# Altium PCB 175-00036, rev1, Super Sniffer.PcbDoc (part 3 of 4)
Units mil, origin at the board's own origin, x right, y up, seen from the top; angles counter-clockwise.
Board outline 6299.21 x 7874.02 mil, 5 copper layers (Top Layer (*.GTL), Mid-Layer 1 (*.G1), Internal Plane 1 (*.GP1), Mid-Layer 2  (*.G2), Bottom Layer (*.GBL)); 205 components, 359 nets, 1160 pads, 445 vias.
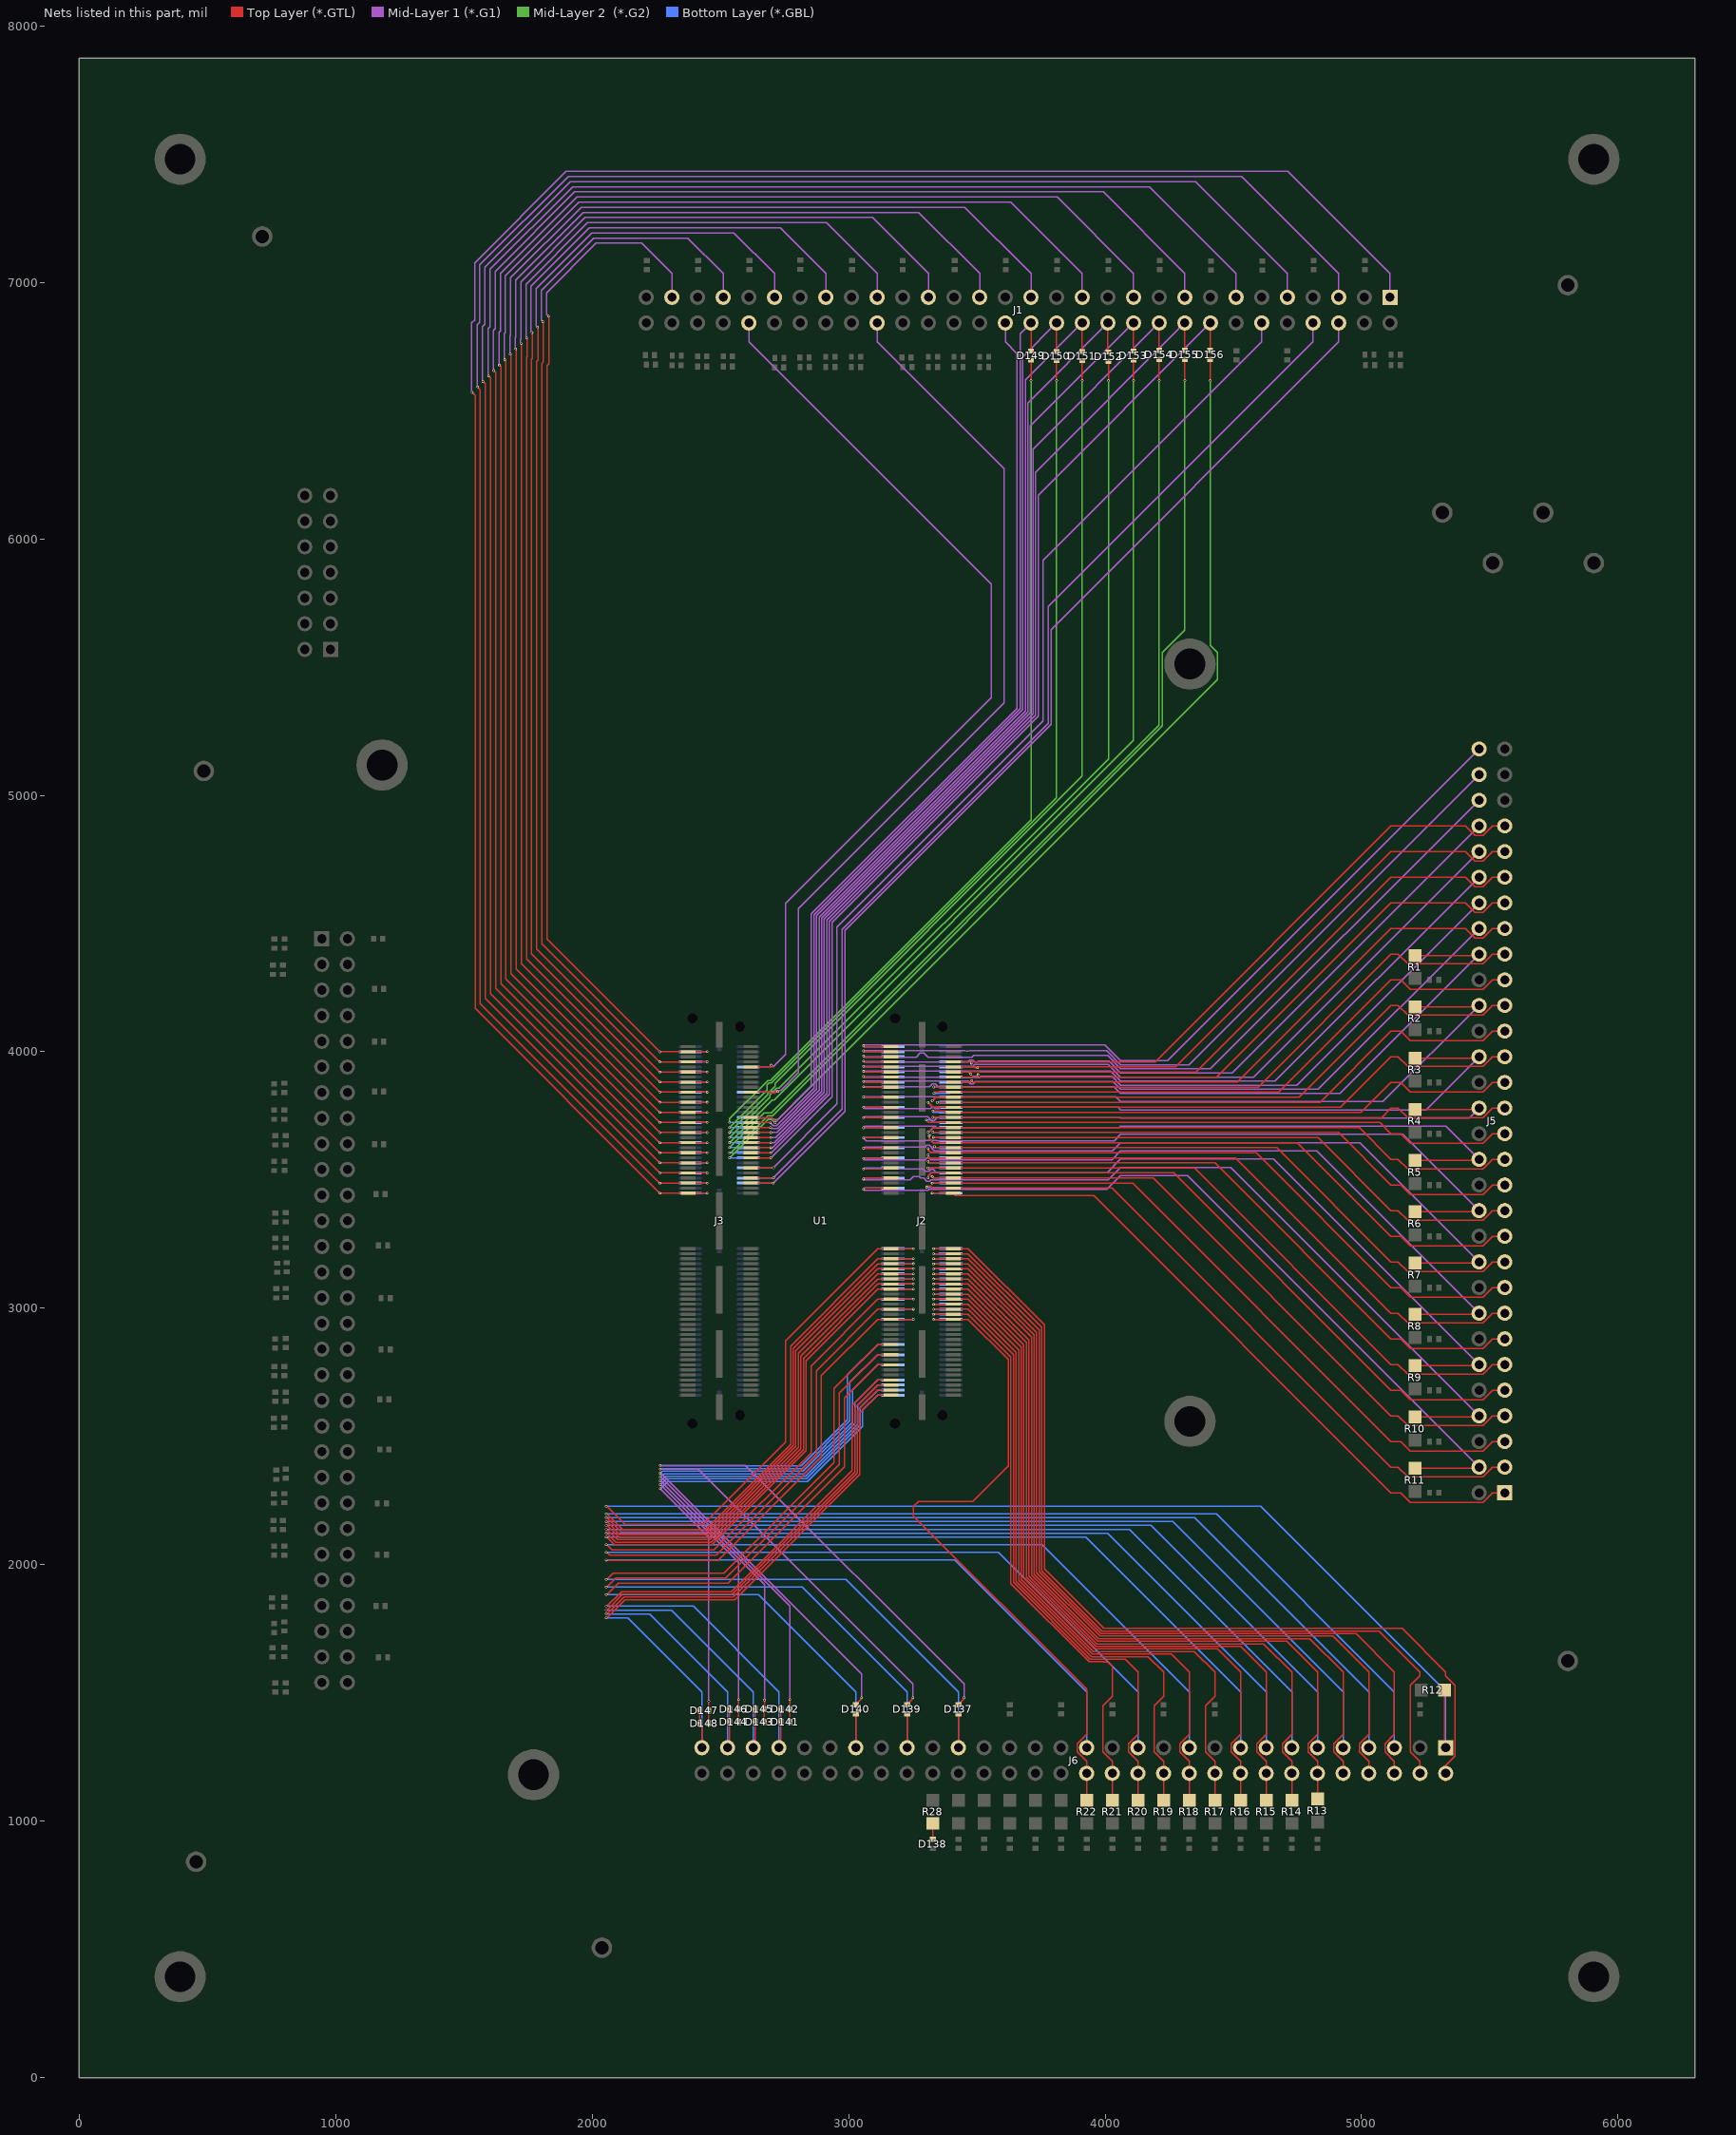
[diagram p6: the nets of this part, all layers, seen from the top]

## Via types
v1: diameter 10, hole 6, Top Layer (*.GTL) to Bottom Layer (*.GBL), 437 vias
v2: diameter 20, hole 10, Top Layer (*.GTL) to Bottom Layer (*.GBL), 8 vias

## Nets (pads, with @x,y where several pads share a name; then routed paths per layer and width w, separated by ;. In a path a pad name is that pad's centre, name@x,y a point inside that pad or via, vN(x,y) a via of type N, cw(c..) or ccw(c..) an arc to the next point about the centre after c; other vN are vias at no path point) (continued)
NetD137_1: D137.1 J6.39 U1.A100 | length 3563.3
  Top Layer (*.GTL) w5: v1(2055.05,1943.35) 2057.72,1943.35 2082.19,1967.81 2512.75,1967.81 2944.05,2399.11 2944.05,2688.39 3114.05,2858.39 U1.A100@3164.9,2858.39 ; J6.39@3428.05,1286.81 D137.1@3428.05,1419.09
  Bottom Layer (*.GBL) w5: v1(2055.05,1943.35) 2989.51,1943.35 3428.05,1504.81 J6.39@3428.05,1286.81
NetD137_2: D137.2 J2.100 | length 2833
  Top Layer (*.GTL) w5: D137.2@3426.05,1454.53 v1@3450.05,1478.53
  Mid-Layer 1 (*.G1) w5: v1(2265.05,2387.31) 2597.55,2387.31 3450.05,1534.81 v1(3450.05,1481.81)
  Bottom Layer (*.GBL) w5: v1(2265.05,2387.31) 2267.55,2384.81 2814.76,2384.81 2995.05,2565.1 2995.05,2740.41 3113.05,2858.41 J2.100@3173.06,2858.41
NetD138_2: D138.2 R28.2 | length 62.3
  Top Layer (*.GTL) w5: D138.2@3328.05,929.53 R28.2@3328.05,991.81
NetD139_1: D139.1 J6.43 U1.A104 | length 3340.5
  Top Layer (*.GTL) w5: v1(2055.05,1913.35) 2057.72,1913.35 2092.19,1947.81 2521.03,1947.81 2964.05,2390.83 2964.05,2669.02 3114.05,2819.02 U1.A104@3164.9,2819.02 ; J6.43@3228.05,1286.81 D139.1@3228.05,1419.09
  Bottom Layer (*.GBL) w5: v1(2055.05,1913.35) 2819.51,1913.35 3228.05,1504.81 J6.43@3228.05,1286.81
NetD139_2: D139.2 J2.104 | length 2600.8
  Top Layer (*.GTL) w5: D139.2@3227.05,1454.53 v1@3251.05,1478.53
  Mid-Layer 1 (*.G1) w5: v1(2265.05,2372.31) 2413.55,2372.31 3251.05,1534.81 v1(3251.05,1481.81)
  Bottom Layer (*.GBL) w5: v1(2265.05,2372.31) 2267.55,2374.81 2818.9,2374.81 3005.05,2560.96 3005.05,2711.01 3113.05,2819.01 J2.104@3173.06,2819.01
NetD140_1: D140.1 J6.47 U1.A108 | length 3117.9
  Top Layer (*.GTL) w5: v1(2055.05,1883.35) 2057.72,1883.35 2101.9,1927.52 2529.44,1927.52 2984.05,2382.13 2984.05,2649.65 3114.05,2779.65 U1.A108@3164.9,2779.65 ; J6.47@3028.05,1286.81 D140.1@3028.05,1419.09
  Bottom Layer (*.GBL) w5: v1(2055.05,1883.35) 2649.51,1883.35 3028.05,1504.81 J6.47@3028.05,1286.81
NetD140_2: D140.2 J2.108 | length 2392.6
  Top Layer (*.GTL) w5: D140.2@3027.05,1454.53 v1@3051.05,1478.53
  Mid-Layer 1 (*.G1) w5: v1(2265.05,2357.31) 2267.72,2357.31 3051.05,1573.99 v1(3051.05,1481.81)
  Bottom Layer (*.GBL) w5: v1(2265.05,2357.31) 2267.72,2357.31 2275.22,2364.81 2823.04,2364.81 3015.05,2556.82 3015.05,2681.61 3113.05,2779.61 J2.108@3173.06,2779.61
NetD141_1: D141.1 D142.2 J6.53 U1.A114 | length 2805.9
  Top Layer (*.GTL) w5: v1(2055.05,1838.35) 2057.72,1838.35 2115.08,1895.7 2542.62,1895.7 3014.05,2367.13 3014.05,2620.6 3114.05,2720.6 U1.A114@3164.9,2720.6 ; J6.53@2728.05,1286.81 2735.33,1294.09 D141.1@2735.33,1386.81 D142.2@2735.33,1436.81
  Bottom Layer (*.GBL) w5: v1(2055.05,1838.35) 2394.51,1838.35 2728.05,1504.81 J6.53@2728.05,1286.81
NetD141_2: D141.2 D142.1 J2.114 | length 2277.1
  Top Layer (*.GTL) w5: D141.2@2770.76,1386.81 D142.1@2770.76,1436.81 ; D142.1@2771.05,1437.81 v1(2771.05,1473.81)
  Mid-Layer 1 (*.G1) w5: v1(2265.05,2342.31) 2267.72,2342.31 2771.05,1838.99 v1(2771.05,1473.81)
  Bottom Layer (*.GBL) w5: v1(2265.05,2342.31) 2267.72,2342.31 2280.22,2354.81 2827.18,2354.81 3025.05,2552.67 3025.05,2632.51 3113.05,2720.51 J2.114@3173.06,2720.51
NetD143_1: D143.1 D145.2 J6.55 U1.A116 | length 2684.7
  Top Layer (*.GTL) w5: v1(2055.05,1823.35) 2057.72,1823.35 2119.47,1885.1 2547.01,1885.1 3024.05,2362.13 3024.05,2610.91 3114.05,2700.91 U1.A116@3164.9,2700.91 ; J6.55@2635.33,1294.09 D143.1@2635.33,1386.81 D145.2@2635.33,1436.81
  Bottom Layer (*.GBL) w5: v1(2055.05,1823.35) 2309.51,1823.35 2628.05,1504.81 J6.55@2628.05,1286.81
NetD143_2: D143.2 D145.1 J2.116 | length 2216.9
  Top Layer (*.GTL) w5: D143.2@2670.76,1386.81 D145.1@2670.76,1436.81 ; D145.1@2672.05,1436.81 v1(2672.05,1472.81)
  Mid-Layer 1 (*.G1) w5: v1(2265.05,2327.31) 2267.72,2327.31 2672.05,1922.99 v1(2672.05,1472.81)
  Bottom Layer (*.GBL) w5: v1(2265.05,2327.31) 2267.72,2327.31 2285.22,2344.81 2831.33,2344.81 3035.05,2548.53 3035.05,2622.81 3113.05,2700.81 J2.116@3173.06,2700.81
NetD144_1: D144.1 D146.2 J6.57 U1.A118 | length 2573.8
  Top Layer (*.GTL) w5: v1(2055.05,1808.35) 2057.72,1808.35 2123.87,1874.49 2551.4,1874.49 3034.05,2357.13 3034.05,2601.23 3114.05,2681.23 U1.A118@3164.9,2681.23 ; J6.57@2535.33,1294.09 D144.1@2535.33,1386.81 D146.2@2535.33,1436.81
  Bottom Layer (*.GBL) w5: v1(2055.05,1808.35) 2224.51,1808.35 2528.05,1504.81 J6.57@2528.05,1286.81
NetD144_2: D144.2 D146.1 J2.118 | length 2153.8
  Top Layer (*.GTL) w5: D144.2@2570.76,1386.81 D146.1@2570.76,1436.81 ; D146.1@2571.05,1437.81 v1(2571.05,1473.81)
  Mid-Layer 1 (*.G1) w5: v1(2265.05,2312.31) 2267.72,2312.31 2571.05,2008.99 v1(2571.05,1473.81)
  Bottom Layer (*.GBL) w5: v1(2265.05,2312.31) 2267.72,2312.31 2290.22,2334.81 2835.47,2334.81 3045.05,2544.39 3045.05,2613.11 3113.05,2681.11 J2.118@3173.06,2681.11
NetD147_1: D147.1 D148.2 J6.59 U1.A120 | length 2468.7
  Top Layer (*.GTL) w5: v1(2055.05,1793.35) 2057.72,1793.35 2128.26,1863.88 2555.8,1863.88 3044.05,2352.13 3044.05,2591.54 3114.05,2661.54 U1.A120@3164.9,2661.54 ; D147.1@2419.61,1431.81 D148.2@2419.61,1381.81 2427.7,1373.72 2427.7,1287.15 J6.59@2428.05,1286.81
  Bottom Layer (*.GBL) w5: v1(2055.05,1793.35) 2139.51,1793.35 2428.05,1504.81 J6.59@2428.05,1286.81
NetD147_2: D147.2 D148.1 J2.120 | length 2090
  Top Layer (*.GTL) w5: D148.1@2455.05,1381.81 D147.2@2455.05,1431.81 v1(2455.05,1467.81)
  Mid-Layer 1 (*.G1) w5: v1(2265.05,2297.31) 2455.05,2107.31 v1(2455.05,1467.81)
  Bottom Layer (*.GBL) w5: v1(2265.05,2297.31) 2267.72,2297.31 2295.22,2324.81 2839.61,2324.81 3055.05,2540.25 3055.05,2603.41 3113.05,2661.41 J2.120@3173.06,2661.41
NetD149_1: D149.1 J1.30 U1.B31 | length 3760.6
  Top Layer (*.GTL) w5: U1.B31@2618.05,3724.54 2697,3724.54 2695.46,3723 v1(2695,3723) ; D149.1@3711.05,6732.28 J1.30@3711.05,6841.81
  Mid-Layer 1 (*.G1) w5: v1(2695,3723) 2706.5,3711.5 2718.18,3711.5 2865,3858.32 2865,4534 3669,5338 3669,6799.76 J1.30@3711.05,6841.81
NetD149_2: D149.2 J3.31 | length 3537.4
  Top Layer (*.GTL) w5: v1(3711.05,6617) D149.2@3711.05,6696.85
  Mid-Layer 2  (*.G2) w5: v1(2536.05,3724.71) 2536.05,3738.87 2685.68,3888.5 2695.18,3888.5 3711.05,4904.37 v1(3711.05,6617)
  Bottom Layer (*.GBL) w5: v1(2536.05,3724.71) J3.31@2609.04,3724.71
NetD150_1: D150.1 J1.28 U1.B33 | length 3808.5
  Top Layer (*.GTL) w5: U1.B33@2618.05,3704.85 2697,3704.85 2696.15,3704 v1(2696,3704) ; D150.1@3811.05,6732.28 J1.28@3811.05,6841.81
  Mid-Layer 1 (*.G1) w5: v1(2696,3704) 2698.5,3701.5 2722.32,3701.5 2875,3854.18 2875,4529.86 3679,5333.86 3679,6709.76 J1.28@3811.05,6841.81
NetD150_2: D150.2 J3.33 | length 3596.5
  Top Layer (*.GTL) w5: v1(3811.05,6617) D150.2@3811.05,6694.89
  Mid-Layer 2  (*.G2) w5: v1(2536.05,3705.01) 2682.5,3851.47 2682.5,3871.18 2689.82,3878.5 2699.32,3878.5 3811.05,4990.23 v1(3811.05,6617)
  Bottom Layer (*.GBL) w5: v1(2536.05,3705.01) J3.33@2609.04,3705.01
NetD151_1: D151.1 J1.26 U1.B35 | length 3861.5
  Top Layer (*.GTL) w5: U1.B35@2618.05,3685.17 v1(2697,3685.17) ; D151.1@3911.05,6732.28 J1.26@3911.05,6841.81
  Mid-Layer 1 (*.G1) w5: v1(2697,3685.17) 2720.13,3685.17 2885,3850.04 2885,4525.72 3689,5329.72 3689,6619.76 J1.26@3911.05,6841.81
NetD151_2: D151.2 J3.35 | length 3652.1
  Top Layer (*.GTL) w5: v1(3911.05,6617) D151.2@3911.05,6694.89
  Mid-Layer 2  (*.G2) w5: v1(2536.05,3685.31) 2683.5,3832.77 2683.5,3836.32 2713.5,3866.32 2713.5,3877.18 3911.05,5074.72 v1(3911.05,6617)
  Bottom Layer (*.GBL) w5: v1(2536.05,3685.31) J3.35@2609.04,3685.31
NetD152_1: D152.1 J1.24 U1.B37 | length 3919.4
  Top Layer (*.GTL) w5: U1.B37@2618.05,3665.48 v1(2697,3665.48) ; D152.1@4011.05,6732.28 J1.24@4011.05,6841.81
  Mid-Layer 1 (*.G1) w5: v1(2697,3665.48) 2714.58,3665.48 2895,3845.9 2895,4521.57 3699,5325.57 3699,6529.76 J1.24@4011.05,6841.81
NetD152_2: D152.2 J3.37 | length 3718.2
  Top Layer (*.GTL) w5: v1(4013.05,6617) D152.2@4013.05,6692.91
  Mid-Layer 2  (*.G2) w5: v1(2536.05,3665.61) 2693.5,3823.07 2693.5,3832.18 2718.82,3857.5 2729.18,3857.5 4013.05,5141.37 v1(4013.05,6617)
  Bottom Layer (*.GBL) w5: v1(2536.05,3665.61) J3.37@2609.04,3665.61
NetD153_1: D153.1 J1.22 U1.B39 | length 3977.3
  Top Layer (*.GTL) w5: U1.B39@2618.05,3645.8 v1(2697,3645.8) ; D153.1@4111.05,6732.28 J1.22@4111.05,6841.81
  Mid-Layer 1 (*.G1) w5: v1(2697,3645.8) 2709.04,3645.8 2905,3841.75 2905,4517.43 3709,5321.43 3709,6439.76 J1.22@4111.05,6841.81
NetD153_2: D153.2 J3.39 | length 3780.7
  Top Layer (*.GTL) w5: v1(4111.05,6617) D153.2@4111.05,6696.85
  Mid-Layer 2  (*.G2) w5: v1(2536.05,3645.91) 2702.09,3811.96 2709.63,3811.96 4111.05,5213.37 v1(4111.05,6617)
  Bottom Layer (*.GBL) w5: v1(2536.05,3645.91) J3.39@2609.04,3645.91
NetD154_1: D154.1 J1.20 U1.B41 | length 4035.1
  Top Layer (*.GTL) w5: U1.B41@2618.05,3626.11 v1(2697,3626.11) ; D154.1@4211.05,6732.28 D154.1@4211.05,6735.53 J1.20@4211.05,6841.81
  Mid-Layer 1 (*.G1) w5: v1(2697,3626.11) 2703.5,3626.11 2915,3837.61 2915,4513.29 3719,5317.29 3719,6349.76 J1.20@4211.05,6841.81
NetD154_2: D154.2 J3.41 | length 3857.1
  Top Layer (*.GTL) w5: v1(4211.05,6617) D154.2@4211.05,6700.09
  Mid-Layer 2  (*.G2) w5: v1(2536.05,3626.21) 2671.14,3761.31 2699.22,3761.31 4211.05,5273.13 v1(4211.05,6617)
  Bottom Layer (*.GBL) w5: v1(2536.05,3626.21) J3.41@2609.04,3626.21
NetD155_1: D155.1 J1.18 U1.B43 | length 4093
  Top Layer (*.GTL) w5: U1.B43@2618.05,3606.43 v1(2697,3606.43) ; D155.1@4311.05,6732.28 D155.1@4311.05,6735.53 J1.18@4311.05,6841.81
  Mid-Layer 1 (*.G1) w5: v1(2697,3606.43) 2697.96,3606.43 2925,3833.47 2925,4509.15 3729,5313.15 3729,6259.76 J1.18@4311.05,6841.81
NetD155_2: D155.2 J3.43 | length 3915
  Top Layer (*.GTL) w5: v1(4311.05,6617) D155.2@4311.05,6700.09
  Mid-Layer 2  (*.G2) w5: v1(2536.05,3606.51) 2541.61,3606.51 2686.4,3751.31 2703.37,3751.31 4223.21,5271.15 4223.21,5556.34 4311.05,5644.18 v1(4311.05,6617)
  Bottom Layer (*.GBL) w5: v1(2536.05,3606.51) J3.43@2609.04,3606.51
NetD156_1: D156.1 J1.16 U1.B45 | length 4153.5
  Top Layer (*.GTL) w5: U1.B45@2618.05,3586.74 v1(2697,3586.74) ; D156.1@4411.05,6732.28 J1.16@4411.05,6841.81
  Mid-Layer 1 (*.G1) w5: v1(2697,3586.74) 2935,3824.74 2935,4505.01 3739,5309.01 3739,6169.76 J1.16@4411.05,6841.81
NetD156_2: D156.2 J3.45 | length 4008.6
  Top Layer (*.GTL) w5: v1(4409.45,6617) D156.2@4409.45,6700.09
  Mid-Layer 2  (*.G2) w5: v1(2536.05,3586.81) 2685.73,3736.5 2724.18,3736.5 4438.21,5450.53 4438.21,5556.34 4409.45,5585.1 v1(4409.45,6617)
  Bottom Layer (*.GBL) w5: v1(2536.05,3586.81) J3.45@2609.04,3586.81
NetJ1_1: J1.1 J3.60 U1.B60 | length 8161.3
  Top Layer (*.GTL) w5: v1(1532.46,6571.22) 1544.05,6559.63 1544.05,4168.94 v1(2264.05,3448.94) U1.B60@2374.74,3448.94 2448.91,3448.94 v1(2449.05,3448.81)
  Mid-Layer 1 (*.G1) w5: v1(1532.46,6571.22) 1530.56,6573.11 1530.56,6841.56 1542.05,6853.05 1542.05,7075.93 1898.93,7432.81 4713.05,7432.81 5111.05,7034.81 J1.1@5111.05,6941.81
  Bottom Layer (*.GBL) w5: J3.60@2383.06,3448.91 2448.94,3448.91 v1(2449.05,3448.81)
NetJ1_5: J1.5 J3.56 U1.B56 | length 7871.2
  Top Layer (*.GTL) w5: v1(1553.67,6592.43) 1564.05,6582.05 1564.05,4188.32 v1(2264.05,3488.32) U1.B56@2374.74,3488.32 2448.94,3488.32 v1(2449.05,3488.21)
  Mid-Layer 1 (*.G1) w5: v1(1553.67,6592.43) 1551.78,6594.33 1551.78,6834.49 1562.05,6844.76 1562.05,7067.65 1907.21,7412.81 4533.05,7412.81 4911.05,7034.81 J1.5@4911.05,6941.81
  Bottom Layer (*.GBL) w5: J3.56@2383.06,3488.31 2448.94,3488.31 v1(2449.05,3488.21)
NetJ1_6: J1.6 J3.55 U1.B55 | length 4451.8
  Top Layer (*.GTL) w5: U1.B55@2618.05,3488.32 v1(2706.05,3488.32)
  Mid-Layer 1 (*.G1) w5: v1(2706.05,3488.32) 2985.05,3767.32 2985.05,4472.97 3789,5276.93 3789,5645.76 4911.05,6767.81 J1.6@4911.05,6841.81
  Bottom Layer (*.GBL) w5: J3.55@2609.04,3488.31 v1(2706.05,3488.32)
NetJ1_8: J1.8 J3.53 U1.B53 | length 4393.7
  Top Layer (*.GTL) w5: U1.B53@2618.05,3508 2706.86,3508 v1(2707.05,3507.81)
  Mid-Layer 1 (*.G1) w5: v1(2707.05,3507.81) 2706.24,3507.81 2706.05,3508 2975.05,3777 2975.05,4477.12 3779,5281.07 3779,5735.76 4811.05,6767.81 J1.8@4811.05,6841.81
  Bottom Layer (*.GBL) w5: J3.53@2609.04,3508.01 v1@2706.84,3508.01
NetJ1_9: J1.9 J3.52 U1.B52 | length 7581.1
  Top Layer (*.GTL) w5: v1(1574.88,6613.65) 1584.05,6604.48 1584.05,4207.69 v1(2264.05,3527.69) U1.B52@2374.74,3527.69 2448.97,3527.69 v1(2449.05,3527.61)
  Mid-Layer 1 (*.G1) w5: v1(1574.88,6613.65) 1572.99,6615.54 1572.99,6827.42 1582.05,6836.48 1582.05,7059.36 1915.49,7392.81 4353.05,7392.81 4711.05,7034.81 J1.9@4711.05,6941.81
  Bottom Layer (*.GBL) w5: J3.52@2383.06,3527.71 2448.94,3527.71 v1(2449.05,3527.61)
NetJ1_12: J1.12 J3.49 U1.B49 | length 4272.1
  Top Layer (*.GTL) w5: U1.B49@2618.05,3547.37 2706.61,3547.37 v1(2707.05,3547.81)
  Mid-Layer 1 (*.G1) w5: v1(2707.05,3547.81) 2706.61,3547.37 2706.05,3547.37 2955.05,3796.37 2955.05,4485.4 3759,5289.35 3759,5915.76 4611.05,6767.81 J1.12@4611.05,6841.81
  Bottom Layer (*.GBL) w5: J3.49@2609.04,3547.41 2706.65,3547.41 v1(2707.05,3547.81)
NetJ1_13: J1.13 J3.48 U1.B48 | length 7291.1
  Top Layer (*.GTL) w5: v1(1596.1,6634.86) 1604.05,6626.91 1604.05,4227.06 v1(2264.05,3567.06) U1.B48@2374.74,3567.06 v1(2449.05,3567.01) v1(2449.05,3567.01)
  Mid-Layer 1 (*.G1) w5: v1(1596.1,6634.86) 1594.2,6636.75 1594.2,6820.35 1602.05,6828.19 1602.05,7051.08 1923.78,7372.81 4173.05,7372.81 4511.05,7034.81 J1.13@4511.05,6941.81
  Bottom Layer (*.GBL) w5: J3.48@2383.06,3567.11 2448.94,3567.11 v1(2449.05,3567.01)
NetJ1_17: J1.17 J3.44 U1.B44 | length 7001
  Top Layer (*.GTL) w5: v1(1617.31,6656.07) 1624.05,6649.33 1624.05,4246.43 v1(2264.05,3606.43) U1.B44@2374.74,3606.43 v1(2449.05,3606.41)
  Mid-Layer 1 (*.G1) w5: v1(1617.31,6656.07) 1615.42,6657.97 1615.42,6813.28 1622.05,6819.91 1622.05,7042.8 1932.06,7352.81 3993.05,7352.81 4311.05,7034.81 J1.17@4311.05,6941.81
  Bottom Layer (*.GBL) w5: J3.44@2383.06,3606.51 2448.94,3606.51 v1(2449.05,3606.41)
NetJ1_21: J1.21 J3.40 U1.B40 | length 6710.9
  Top Layer (*.GTL) w5: v1(1638.52,6677.29) 1644.05,6671.76 1644.05,4265.8 v1(2264.05,3645.8) U1.B40@2374.74,3645.8 2406.05,3645.8 v1(2449.05,3645.81)
  Mid-Layer 1 (*.G1) w5: v1(1638.52,6677.29) 1636.63,6679.18 1636.63,6806.21 1642.05,6811.63 1642.05,7034.51 1940.35,7332.81 3813.05,7332.81 4111.05,7034.81 J1.21@4111.05,6941.81
  Bottom Layer (*.GBL) w5: J3.40@2383.06,3645.91 2448.94,3645.91 v1(2449.05,3645.81)
NetJ1_25: J1.25 J3.36 U1.B36 | length 6420.8
  Top Layer (*.GTL) w5: v1(1659.74,6698.5) 1664.05,6694.19 1664.05,4285.17 v1(2264.05,3685.17) U1.B36@2374.74,3685.17 2406.05,3685.17 2406.09,3685.21 v1(2449.05,3685.21)
  Mid-Layer 1 (*.G1) w5: v1(1659.74,6698.5) 1657.84,6700.39 1657.84,6799.14 1662.05,6803.34 1662.05,7026.23 1948.63,7312.81 3633.05,7312.81 3911.05,7034.81 J1.25@3911.05,6941.81
  Bottom Layer (*.GBL) w5: J3.36@2383.06,3685.31 2448.94,3685.31 v1(2449.05,3685.21)
NetJ1_29: J1.29 J3.32 U1.B32 | length 6130.7
  Top Layer (*.GTL) w5: v1(1680.95,6719.71) 1684.05,6716.61 1684.05,4304.54 v1(2264.05,3724.54) U1.B32@2374.74,3724.54 2406.05,3724.54 2406.12,3724.61 v1(2449.05,3724.61)
  Mid-Layer 1 (*.G1) w5: v1(1680.95,6719.71) 1679.05,6721.61 1679.05,6792.06 1682.05,6795.06 1682.05,7017.94 1956.92,7292.81 3453.05,7292.81 3711.05,7034.81 J1.29@3711.05,6941.81
  Bottom Layer (*.GBL) w5: J3.32@2383.06,3724.71 2448.94,3724.71 v1(2449.05,3724.61)
NetJ1_32: J1.32 J3.29 U1.B29 | length 3746.9
  Top Layer (*.GTL) w5: U1.B29@2618.05,3744.22 2699.78,3744.22 2713,3731 v1(2713,3724)
  Mid-Layer 1 (*.G1) w5: v1(2713,3724) 2713,3725.32 2855,3867.32 2855,4538.14 3656.05,5339.19 3656.05,6722.81 3611.05,6767.81 J1.32@3611.05,6841.81
  Bottom Layer (*.GBL) w5: J3.29@2609.04,3744.41 2612.14,3741.31 2694.87,3741.31 2712.18,3724 v1(2713,3724)
NetJ1_33: J1.33 J3.28 U1.B28 | length 5840.7
  Top Layer (*.GTL) w5: v1(1702.16,6740.93) 1704.05,6739.03 1704.05,6725.14 ; 1704.05,6725.13 1704.05,4323.91 v1(2264.05,3763.91) U1.B28@2374.74,3763.91 2448.94,3763.91 v1(2449.05,3764.01)
  Mid-Layer 1 (*.G1) w5: v1(1702.16,6740.93) 1700.27,6742.82 1700.27,6784.99 1702.05,6786.77 1702.05,7009.66 1965.2,7272.81 3273.05,7272.81 3511.05,7034.81 J1.33@3511.05,6941.81
  Bottom Layer (*.GBL) w5: J3.28@2383.06,3764.11 2447.05,3764.11 2447.15,3764.01 v1(2449.05,3764.01)
NetJ1_37: J1.37 J3.24 U1.B24 | length 5551.6
  Top Layer (*.GTL) w5: v1(1723.37,6762.14) 1725.27,6760.25 1725.27,6718.07 1724.05,6716.85 1724.05,4343.28 v1(2264.05,3803.28) U1.B24@2374.74,3803.28 2448.91,3803.28 v1(2449.05,3803.41)
  Mid-Layer 1 (*.G1) w5: v1(1723.37,6762.14) 1721.48,6764.03 1721.48,6777.92 1722.05,6778.49 1722.05,7001.37 1973.48,7252.81 3093.05,7252.81 3311.05,7034.81 J1.37@3311.05,6941.81
  Bottom Layer (*.GBL) w5: J3.24@2383.06,3803.51 2447.05,3803.51 2447.15,3803.41 v1(2449.05,3803.41)
NetJ1_41: J1.41 J3.20 U1.B20 | length 5263.1
  Top Layer (*.GTL) w5: v1(1744.59,6783.35) 1746.48,6781.46 1746.48,6711 1744.05,6708.57 1744.05,4362.65 v1(2264.05,3842.65) U1.B20@2374.74,3842.65 2448.88,3842.65 v1(2449.05,3842.81)
  Mid-Layer 1 (*.G1) w5: v1(1744.59,6783.35) 1742.05,6785.89 1742.05,6993.09 1981.77,7232.81 2913.05,7232.81 3111.05,7034.81 J1.41@3111.05,6941.81
  Bottom Layer (*.GBL) w5: J3.20@2383.06,3842.91 2447.05,3842.91 2447.15,3842.81 v1(2449.05,3842.81)
NetJ1_42: J1.42 J3.19 U1.B19 | length 3843.3
  Top Layer (*.GTL) w5: U1.B19@2618.05,3842.65 2694.18,3842.65 2696.38,3840.45 2706.73,3840.45 2707.49,3841.2 2709.88,3838.81 2710.05,3838.81 2718.05,3846.81 2721.86,3843 2722,3843 v1(2724,3845)
  Mid-Layer 1 (*.G1) w5: v1(2724,3845) 2722,3843 2721.86,3843 2718.05,3846.81 2710.05,3838.81 2709.88,3838.81 2707.49,3841.2 2714.06,3847.77 2714.06,3849.31 2735.13,3849.31 2805,3919.18 2805,4558.85 3606.05,5359.9 3606.05,6272.81 3111.05,6767.81 J1.42@3111.05,6841.81
  Bottom Layer (*.GBL) w5: J3.19@2609.04,3842.91 2694.18,3842.91 2696.73,3845.46 v1@2724,3845.46
NetJ1_45: J1.45 J3.16 U1.B16 | length 4975
  Top Layer (*.GTL) w5: v1(1765.8,6804.56) 1767.69,6802.67 1767.69,6703.93 1764.05,6700.28 1764.05,4382.02 v1(2264.05,3882.02) U1.B16@2374.74,3882.02 2448.85,3882.02 v1(2449.05,3882.21)
  Mid-Layer 1 (*.G1) w5: v1(1765.8,6804.56) 1762.05,6808.32 1762.05,6984.81 1990.05,7212.81 2733.05,7212.81 2911.05,7034.81 J1.45@2911.05,6941.81
  Bottom Layer (*.GBL) w5: J3.16@2383.06,3882.31 2447.05,3882.31 2447.15,3882.21 v1(2449.05,3882.21)
NetJ1_49: J1.49 J3.12 U1.B12 | length 4687
  Top Layer (*.GTL) w5: v1(1787.01,6825.78) 1788.91,6823.88 1788.91,6696.86 1784.05,6692 1784.05,4401.39 v1(2264.05,3921.39) U1.B12@2374.74,3921.39 2448.82,3921.39 v1(2449.05,3921.61)
  Mid-Layer 1 (*.G1) w5: v1(1787.01,6825.78) 1782.05,6830.75 1782.05,6976.52 1998.34,7192.81 2553.05,7192.81 2711.05,7034.81 J1.49@2711.05,6941.81
  Bottom Layer (*.GBL) w5: J3.12@2383.06,3921.71 2447.05,3921.71 2447.15,3921.61 v1(2449.05,3921.61)
NetJ1_52: J1.52 J3.9 U1.B9 | length 3843.7
  Top Layer (*.GTL) w5: U1.B9@2618.05,3941.07 2706.05,3941.07 2700.73,3946.39 2699.2,3946.39 v1(2697.78,3947.81)
  Mid-Layer 1 (*.G1) w5: J1.52@2611.05,6841.81 2611.05,6767.81 3556.05,5822.81 3556.05,5380.61 2755,4579.56 2755,3990.02 2706.05,3941.07 2700.73,3946.39 2699.2,3946.39 v1(2697.78,3947.81)
  Bottom Layer (*.GBL) w5: J3.9@2609.04,3941.41 2692.83,3941.41 v1@2696.73,3945.31
NetJ1_53: J1.53 J3.8 U1.B8 | length 4398.9
  Top Layer (*.GTL) w5: v1(1808.23,6846.99) 1810.12,6845.1 1810.12,6689.79 1804.05,6683.71 1804.05,4420.76 v1(2264.05,3960.76) U1.B8@2374.74,3960.76 2448.79,3960.76 v1(2449.05,3961.01)
  Mid-Layer 1 (*.G1) w5: v1(1808.23,6846.99) 1802.05,6853.17 1802.05,6968.24 2006.62,7172.81 2373.05,7172.81 2511.05,7034.81 J1.53@2511.05,6941.81
  Bottom Layer (*.GBL) w5: J3.8@2383.06,3961.11 2447.05,3961.11 2447.15,3961.01 v1(2449.05,3961.01)
NetJ1_57: J1.57 J3.4 U1.B4 | length 4110.9
  Top Layer (*.GTL) w5: v1(1829.44,6868.2) 1831.33,6866.31 1831.33,6682.72 1824.05,6675.43 1824.05,4440.13 v1(2264.05,4000.13) U1.B4@2374.74,4000.13 2448.76,4000.13 v1(2449.05,4000.41)
  Mid-Layer 1 (*.G1) w5: v1(1829.44,6868.2) 1822.05,6875.6 1822.05,6959.95 2014.91,7152.81 2193.05,7152.81 2311.05,7034.81 J1.57@2311.05,6941.81
  Bottom Layer (*.GBL) w5: J3.4@2383.06,4000.51 2447.05,4000.51 2447.15,4000.41 v1(2449.05,4000.41)
NetJ2_2: J2.2 J5.60 U1.A2 | length 3155.2
  Top Layer (*.GTL) w5: v1(3058.05,4023.81) 3062.05,4019.81 U1.A2@3164.9,4019.81
  Mid-Layer 1 (*.G1) w5: v1(3058.05,4023.81) 3061.55,4027.31 3999.55,4027.31 4061.05,3965.81 4243.05,3965.81 J5.60@5458.05,5180.81
  Bottom Layer (*.GBL) w5: v1(3058.05,4023.81) 3061.64,4020.21 J2.2@3173.06,4020.21
NetJ2_4: J2.4 J5.58 U1.A4 | length 3118.5
  Top Layer (*.GTL) w5: v1(3058.05,4003.81) 3061.73,4000.13 U1.A4@3164.9,4000.13
  Mid-Layer 1 (*.G1) w5: v1(3058.05,4003.81) 3059.55,4005.31 3454.87,4005.31 3457.87,4002.31 3468.22,4002.31 3470.22,4004.31 4006.55,4004.31 4061.05,3949.81 4327.05,3949.81 J5.58@5458.05,5080.81
  Bottom Layer (*.GBL) w5: v1(3058.05,4003.81) 3061.34,4000.51 J2.4@3173.06,4000.51
NetJ2_6: J2.6 J5.56 U1.A6 | length 3097.1
  Top Layer (*.GTL) w5: v1(3058.05,3983.81) 3061.42,3980.44 U1.A6@3164.9,3980.44
  Mid-Layer 1 (*.G1) w5: v1(3058.05,3983.81) 3062.55,3979.31 3262.8,3979.31 3278.8,3995.31 3293.3,3995.31 3309.3,3979.31 3481.22,3979.31 3487.22,3985.31 4009.55,3985.31 4061.05,3933.81 4411.05,3933.81 J5.56@5458.05,4980.81
  Bottom Layer (*.GBL) w5: v1(3058.05,3983.81) 3061.04,3980.81 J2.6@3173.06,3980.81
NetJ2_7: J2.7 J5.53 U1.A7 | length 2649.5
  Top Layer (*.GTL) w5: U1.A7@3408.2,3960.76 3408.65,3960.31 v1@3481.05,3960.31 ; v1(3479.05,3955.81) 3479.05,3958.31 v1@3481.05,3960.31 ; J5.53@5558.05,4880.81 5510.41,4880.81 5473.38,4843.78 5442.71,4843.78 5405.68,4880.81 5115.05,4880.81 4194.55,3960.31 v1@3481.05,3960.31
  Bottom Layer (*.GBL) w5: J2.7@3399.04,3961.11 3473.74,3961.11 v1(3479.05,3955.81)
NetJ2_8: J2.8 J5.54 U1.A8 | length 3051.7
  Top Layer (*.GTL) w5: v1(3058.05,3963.81) 3061.1,3960.76 U1.A8@3164.9,3960.76
  Mid-Layer 1 (*.G1) w5: v1(3058.05,3963.81) 3061.55,3960.31 3465.87,3960.31 3473.87,3968.31 3484.87,3968.31 3492.87,3960.31 3503.22,3960.31 3506.72,3963.81 4015.05,3963.81 4061.05,3917.81 4495.05,3917.81 J5.54@5458.05,4880.81
  Bottom Layer (*.GBL) w5: v1(3058.05,3963.81) 3060.74,3961.11 J2.8@3173.06,3961.11
NetJ2_9: J2.9 J5.51 U1.A9 | length 2651
  Top Layer (*.GTL) w5: U1.A9@3408.2,3941.07 3489.05,3941.07 ; v1(3503.05,3937.81) 3492.31,3937.81 3489.05,3941.07 ; J5.51@5558.05,4780.81 5510.41,4780.81 5473.38,4743.78 5442.71,4743.78 5405.68,4780.81 5115.05,4780.81 4275.31,3941.07 3489.05,3941.07
  Bottom Layer (*.GBL) w5: J2.9@3399.04,3941.41 3502.44,3941.41 3503.05,3940.81 v1(3503.05,3937.81)
NetJ2_10: J2.10 J5.52 U1.A10 | length 3011.3
  Top Layer (*.GTL) w5: v1(3058.05,3943.81) 3060.79,3941.07 U1.A10@3164.9,3941.07
  Mid-Layer 1 (*.G1) w5: v1(3058.05,3943.81) 3058.55,3943.31 3484.22,3943.31 3491.22,3950.31 4012.55,3950.31 4061.05,3901.81 4579.05,3901.81 J5.52@5458.05,4780.81
  Bottom Layer (*.GBL) w5: v1(3058.05,3943.81) 3060.44,3941.41 J2.10@3173.06,3941.41
NetJ2_11: J2.11 J5.49 U1.A11 | length 2590.5
  Top Layer (*.GTL) w5: U1.A11@3408.2,3921.39 3468.47,3921.39 ; v1(3477.05,3912.81) 3468.47,3921.39 ; J5.49@5558.05,4680.81 5510.41,4680.81 5473.38,4643.78 5442.71,4643.78 5405.68,4680.81 5115.05,4680.81 4355.62,3921.39 3511.15,3921.39 3509.22,3923.31 3470.4,3923.31 3468.47,3921.39
  Bottom Layer (*.GBL) w5: J2.11@3399.04,3921.71 3468.14,3921.71 v1(3477.05,3912.81)
NetJ2_12: J2.12 J5.50 U1.A12 | length 2970
  Top Layer (*.GTL) w5: v1(3058.05,3923.81) 3060.47,3921.39 U1.A12@3164.9,3921.39
  Mid-Layer 1 (*.G1) w5: v1(3058.05,3923.81) 3059.55,3925.31 4021.55,3925.31 4061.05,3885.81 4663.05,3885.81 J5.50@5458.05,4680.81
  Bottom Layer (*.GBL) w5: v1(3058.05,3923.81) 3060.14,3921.71 J2.12@3173.06,3921.71
NetJ2_13: J2.13 J5.47 U1.A13 | length 2583.9
  Top Layer (*.GTL) w5: U1.A13@3408.2,3901.7 3409.59,3900.31 3505.05,3900.31 ; v1(3504.05,3910.81) 3505.05,3909.81 3505.05,3900.31 ; J5.47@5558.05,4580.81 5510.41,4580.81 5473.38,4543.78 5442.71,4543.78 5405.68,4580.81 5115.05,4580.81 4434.55,3900.31 3505.05,3900.31
  Bottom Layer (*.GBL) w5: J2.13@3399.04,3902.01 3400.74,3900.31 3493.55,3900.31 v1(3504.05,3910.81)
NetJ2_14: J2.14 J5.48 U1.A14 | length 2939.5
  Top Layer (*.GTL) w5: v1(3058.05,3903.81) 3060.16,3901.7 U1.A14@3164.9,3901.7
  Mid-Layer 1 (*.G1) w5: v1(3058.05,3903.81) 3061.55,3900.31 3482.22,3900.31 3485.72,3903.81 3493.37,3903.81 3498.87,3898.31 3509.22,3898.31 3514.72,3903.81 4027.05,3903.81 4061.05,3869.81 4747.05,3869.81 J5.48@5458.05,4580.81
  Bottom Layer (*.GBL) w5: v1(3058.05,3903.81) 3059.84,3902.01 J2.14@3173.06,3902.01
NetJ2_15: J2.15 J5.45 U1.A15 | length 2526.3
  Top Layer (*.GTL) w5: U1.A15@3408.2,3882.02 3471.25,3882.02 ; v1(3480.05,3887.81) 3480.05,3889.81 3479.55,3890.31 3471.25,3882.02 ; J5.45@5558.05,4480.81 5510.41,4480.81 5473.38,4443.78 5442.71,4443.78 5405.68,4480.81 5115.05,4480.81 4516.25,3882.02 3471.25,3882.02
  Bottom Layer (*.GBL) w5: J2.15@3399.04,3882.31 3474.55,3882.31 v1(3480.05,3887.81)
NetJ2_16: J2.16 J5.46 U1.A16 | length 2903.6
  Top Layer (*.GTL) w5: v1(3058.05,3883.81) 3059.84,3882.02 U1.A16@3164.9,3882.02
  Mid-Layer 1 (*.G1) w5: v1(3058.05,3883.81) 3059.55,3885.31 3464.87,3885.31 3474.87,3875.31 3485.22,3875.31 3493.72,3883.81 4031.05,3883.81 4061.05,3853.81 4831.05,3853.81 J5.46@5458.05,4480.81
  Bottom Layer (*.GBL) w5: v1(3058.05,3883.81) 3059.54,3882.31 J2.16@3173.06,3882.31
NetJ2_17: J2.17 J5.43 U1.A17 | length 2539.1
  Top Layer (*.GTL) w5: v1(3332.05,3862.81) 3407.72,3862.81 U1.A17@3408.2,3862.33 4596.57,3862.33 5115.05,4380.81 5142.44,4380.81 5179.94,4343.31 5472.91,4343.31 5510.41,4380.81 J5.43@5558.05,4380.81
  Bottom Layer (*.GBL) w5: v1(3332.05,3862.81) 3332.24,3862.61 J2.17@3399.04,3862.61
NetJ2_18: J2.18 J5.44 R1.1 U1.A18 | length 3113.2
  Top Layer (*.GTL) w5: v1(3058.05,3863.81) 3059.53,3862.33 U1.A18@3164.9,3862.33 ; R1.1@5208.05,4375.81 J5.44@5453.05,4375.81
  Mid-Layer 1 (*.G1) w5: v1(3058.05,3863.81) 3315.37,3863.81 3326.87,3875.31 3337.22,3875.31 3348.72,3863.81 4035.05,3863.81 4061.05,3837.81 4915.05,3837.81 J5.44@5458.05,4380.81
  Bottom Layer (*.GBL) w5: v1(3058.05,3863.81) 3059.24,3862.61 J2.18@3173.06,3862.61
NetJ2_19: J2.19 J5.41 U1.A19 | length 2510
  Top Layer (*.GTL) w5: v1(3333.05,3837.81) 3333.21,3837.98 3333.21,3842.65 U1.A19@3408.2,3842.65 4676.88,3842.65 5115.05,4280.81 5152.44,4280.81 5189.47,4243.78 5473.38,4243.78 5510.41,4280.81 J5.41@5558.05,4280.81
  Bottom Layer (*.GBL) w5: v1(3333.05,3837.81) 3393.94,3837.81 J2.19@3399.04,3842.91
NetJ2_21: J2.21 J5.39 U1.A21 | length 2496
  Top Layer (*.GTL) w5: v1(3326,3809) 3339.96,3822.96 U1.A21@3408.2,3822.96 4757.2,3822.96 5115.05,4180.81 5142.44,4180.81 5179.94,4143.31 5472.91,4143.31 5510.41,4180.81 J5.39@5558.05,4180.81
  Bottom Layer (*.GBL) w5: v1(3326,3809) 3340.21,3823.21 J2.21@3399.04,3823.21
NetJ2_22: J2.22 J5.40 R2.1 U1.A22 | length 3031.5
  Top Layer (*.GTL) w5: v1(3058.05,3823.81) 3058.9,3822.96 U1.A22@3164.9,3822.96 ; R2.1@5208.05,4175.81 J5.40@5453.05,4175.81
  Mid-Layer 1 (*.G1) w5: v1(3058.05,3823.81) 3059.55,3825.31 4041.55,3825.31 4061.05,3805.81 5083.05,3805.81 J5.40@5458.05,4180.81
  Bottom Layer (*.GBL) w5: v1(3058.05,3823.81) 3058.64,3823.21 J2.22@3173.06,3823.21
NetJ2_23: J2.23 J5.37 U1.A23 | length 2428
  Top Layer (*.GTL) w5: v1(3346.05,3802.81) 3344.05,3800.81 3342.51,3802.35 3342.51,3803.28 U1.A23@3408.2,3803.28 4837.51,3803.28 5115.05,4080.81 5152.44,4080.81 5189.47,4043.78 5473.38,4043.78 5510.41,4080.81 J5.37@5558.05,4080.81
  Bottom Layer (*.GBL) w5: v1(3346.05,3802.81) 3344.05,3800.81 3343.05,3800.81 3345.75,3803.51 J2.23@3399.04,3803.51
NetJ2_25: J2.25 J5.35 U1.A25 | length 2465.6
  Top Layer (*.GTL) w5: v1(3310.05,3802.81) 3329.27,3783.59 U1.A25@3408.2,3783.59 4917.83,3783.59 5115.05,3980.81 5142.44,3980.81 5179.94,3943.31 5472.91,3943.31 5510.41,3980.81 J5.35@5558.05,3980.81
  Bottom Layer (*.GBL) w5: v1(3310.05,3802.81) 3329.04,3783.81 J2.25@3399.04,3783.81
NetJ2_26: J2.26 J5.36 R3.1 U1.A26 | length 2964.7
  Top Layer (*.GTL) w5: v1(3058.05,3783.81) 3058.27,3783.59 U1.A26@3164.9,3783.59 ; R3.1@5208.05,3975.81 J5.36@5453.05,3975.81
  Mid-Layer 1 (*.G1) w5: v1(3058.05,3783.81) 3063.55,3778.31 3318.87,3778.31 3322.87,3782.31 3333.22,3782.31 3337.22,3778.31 3353.37,3778.31 3358.87,3783.81 4051.05,3783.81 4061.05,3773.81 5251.05,3773.81 J5.36@5458.05,3980.81
  Bottom Layer (*.GBL) w5: v1(3058.05,3783.81) 3125.04,3783.81 J2.26@3173.06,3783.81
NetJ2_27: J2.27 J5.33 U1.A27 | length 2387.1
  Top Layer (*.GTL) w5: v1(3328.05,3769.81) 3371.14,3769.81 3377.05,3763.91 U1.A27@3408.2,3763.91 4998.14,3763.91 5115.05,3880.81 5152.44,3880.81 5189.47,3843.78 5473.38,3843.78 5510.41,3880.81 J5.33@5558.05,3880.81
  Bottom Layer (*.GBL) w5: v1(3328.05,3769.81) 3328.05,3766.11 3330.05,3764.11 J2.27@3399.04,3764.11
NetJ2_29: J2.29 J5.31 U1.A29 | length 2347.3
  Top Layer (*.GTL) w5: v1(3328.05,3744.41) 3376.85,3744.41 3377.05,3744.22 U1.A29@3408.2,3744.22 5078.46,3744.22 5115.05,3780.81 5142.44,3780.81 5179.94,3743.31 5472.91,3743.31 5510.41,3780.81 J5.31@5558.05,3780.81
  Bottom Layer (*.GBL) w5: v1(3328.05,3744.41) J2.29@3399.04,3744.41
NetJ2_30: J2.30 J5.32 R4.1 U1.A30 | length 2896.7
  Top Layer (*.GTL) w5: v1(3058.05,3743.81) 3058.46,3744.22 U1.A30@3164.9,3744.22 ; R4.1@5208.05,3775.81 J5.32@5453.05,3775.81
  Mid-Layer 1 (*.G1) w5: v1(3058.05,3743.81) 3061.15,3746.91 3307.87,3746.91 3315.19,3739.59 3322.87,3731.91 3333.22,3731.91 3345.12,3743.81 4059.05,3743.81 4061.05,3741.81 5419.05,3741.81 J5.32@5458.05,3780.81
  Bottom Layer (*.GBL) w5: v1(3058.05,3743.81) 3124.44,3743.81 3125.05,3744.41 J2.30@3173.06,3744.41
NetJ2_31: J2.31 J5.29 U1.A31 | length 2408.6
  Top Layer (*.GTL) w5: v1(3302.69,3734.41) 3312.57,3724.54 U1.A31@3408.2,3724.54 5071.32,3724.54 5115.05,3680.81 5152.44,3680.81 5189.47,3643.78 5473.38,3643.78 5510.41,3680.81 J5.29@5558.05,3680.81
  Bottom Layer (*.GBL) w5: v1(3302.69,3734.41) 3318.35,3734.41 3328.05,3724.71 J2.31@3399.04,3724.71
NetJ2_33: J2.33 J5.27 U1.A33 | length 2434.4
  Top Layer (*.GTL) w5: v1(3310.05,3686.81) 3328.09,3704.85 U1.A33@3408.2,3704.85 4991.01,3704.85 5115.05,3580.81 5142.44,3580.81 5179.94,3543.31 5472.91,3543.31 5510.41,3580.81 J5.27@5558.05,3580.81
  Bottom Layer (*.GBL) w5: v1(3310.05,3686.81) 3311.37,3686.81 3329.57,3705.01 J2.33@3399.04,3705.01
NetJ2_34: J2.34 J5.28 R5.1 U1.A34 | length 2928.3
  Top Layer (*.GTL) w5: v1(3058.05,3703.81) 3059.09,3704.85 U1.A34@3164.9,3704.85 ; R5.1@5208.05,3575.81 J5.28@5453.05,3575.81
  Mid-Layer 1 (*.G1) w5: v1(3058.05,3703.81) 3063.55,3709.31 3338.37,3709.31 3343.87,3703.81 4055.05,3703.81 4061.05,3709.81 5329.05,3709.81 J5.28@5458.05,3580.81
  Bottom Layer (*.GBL) w5: v1(3058.05,3703.81) 3059.25,3705.01 J2.34@3173.06,3705.01
NetJ2_35: J2.35 J5.25 U1.A35 | length 2415.6
  Top Layer (*.GTL) w5: v1(3329.05,3686.81) 3330.69,3685.17 U1.A35@3408.2,3685.17 4910.69,3685.17 5115.05,3480.81 5152.44,3480.81 5189.47,3443.78 5473.38,3443.78 5510.41,3480.81 J5.25@5558.05,3480.81
  Bottom Layer (*.GBL) w5: v1(3329.05,3686.81) 3330.54,3685.31 J2.35@3399.04,3685.31
NetJ2_37: J2.37 J5.23 U1.A37 | length 2455.1
  Top Layer (*.GTL) w5: v1(3330.05,3666.81) 3329.05,3665.81 3328.38,3665.81 3328.05,3665.48 U1.A37@3408.2,3665.48 4830.38,3665.48 5115.05,3380.81 5142.44,3380.81 5179.94,3343.31 5472.91,3343.31 5510.41,3380.81 J5.23@5558.05,3380.81
  Bottom Layer (*.GBL) w5: v1(3330.05,3666.81) 3329.05,3665.81 3328.38,3665.81 3328.05,3665.48 3350.91,3665.48 3351.05,3665.61 J2.37@3399.04,3665.61
NetJ2_38: J2.38 J5.24 R6.1 U1.A38 | length 3008
  Top Layer (*.GTL) w5: v1(3058.05,3663.81) 3059.72,3665.48 U1.A38@3164.9,3665.48 ; R6.1@5208.05,3375.81 J5.24@5453.05,3375.81
  Mid-Layer 1 (*.G1) w5: v1(3058.05,3663.81) 3068.88,3652.98 3294.25,3652.98 3296.59,3655.31 3323.51,3655.31 3324.51,3654.31 3343.37,3654.31 3344.7,3652.98 4036.22,3652.98 4061.05,3677.81 5161.05,3677.81 J5.24@5458.05,3380.81
  Bottom Layer (*.GBL) w5: v1(3058.05,3663.81) 3059.85,3665.61 J2.38@3173.06,3665.61
NetJ2_39: J2.39 J5.21 U1.A39 | length 2559.8
  Top Layer (*.GTL) w5: 3317.39,3676.47 3315.55,3674.63 3315.55,3660.3 3330.05,3645.8 U1.A39@3408.2,3645.8 4750.06,3645.8 5115.05,3280.81 5152.44,3280.81 5189.47,3243.78 5473.38,3243.78 5510.41,3280.81 J5.21@5558.05,3280.81
  Bottom Layer (*.GBL) w5: 3317.39,3676.47 3317.56,3676.65 3321.53,3676.65 3315.55,3670.66 3315.55,3660.3 3329.94,3645.91 J2.39@3399.04,3645.91
  other v1: 3313.17,3671.81
NetJ2_41: J2.41 J5.19 U1.A41 | length 2534.2
  Top Layer (*.GTL) w5: v1(3335.05,3630.81) 3332.75,3630.81 3328.05,3626.11 U1.A41@3408.2,3626.11 4669.75,3626.11 5115.05,3180.81 5142.44,3180.81 5179.94,3143.31 5472.91,3143.31 5510.41,3180.81 J5.19@5558.05,3180.81
  Bottom Layer (*.GBL) w5: v1(3335.05,3630.81) 3332.75,3630.81 3328.15,3626.21 J2.41@3399.04,3626.21
NetJ2_42: J2.42 J5.20 R7.1 U1.A42 | length 3089.9
  Top Layer (*.GTL) w5: v1(3058.05,3623.81) 3130.75,3623.81 3133.05,3626.11 U1.A42@3164.9,3626.11 ; R7.1@5208.05,3175.81 J5.20@5453.05,3175.81
  Mid-Layer 1 (*.G1) w5: v1(3058.05,3623.81) 3063.55,3629.31 3298.87,3629.31 3304.87,3635.31 3315.22,3635.31 3322.55,3627.99 3322.55,3625.63 3334.57,3613.61 4028.85,3613.61 4061.05,3645.81 4993.05,3645.81 J5.20@5458.05,3180.81
  Bottom Layer (*.GBL) w5: v1(3058.05,3623.81) 3060.45,3626.21 J2.42@3173.06,3626.21
NetJ2_43: J2.43 J5.17 U1.A43 | length 2606
  Top Layer (*.GTL) w5: v1(3310.05,3622.81) 3310.05,3616.81 3320.43,3606.43 U1.A43@3408.2,3606.43 4589.43,3606.43 5115.05,3080.81 5152.44,3080.81 5189.47,3043.78 5473.38,3043.78 5510.41,3080.81 J5.17@5558.05,3080.81
  Bottom Layer (*.GBL) w5: v1(3310.05,3622.81) 3310.05,3616.81 3320.34,3606.51 J2.43@3399.04,3606.51
NetJ2_45: J2.45 J5.15 U1.A45 | length 2635.2
  Top Layer (*.GTL) w5: v1(3310.05,3597.81) 3310.05,3591.81 3315.12,3586.74 U1.A45@3408.2,3586.74 4509.12,3586.74 5115.05,2980.81 5142.44,2980.81 5179.94,2943.31 5472.91,2943.31 5510.41,2980.81 J5.15@5558.05,2980.81
  Bottom Layer (*.GBL) w5: v1(3310.05,3597.81) 3310.05,3591.81 3315.04,3586.81 J2.45@3399.04,3586.81
NetJ2_46: J2.46 J5.16 R8.1 U1.A46 | length 3152.6
  Top Layer (*.GTL) w5: v1(3058.05,3583.81) 3130.12,3583.81 3133.05,3586.74 U1.A46@3164.9,3586.74 ; R8.1@5208.05,2975.81 J5.16@5453.05,2975.81
  Mid-Layer 1 (*.G1) w5: v1(3058.05,3583.81) 3062.55,3579.31 3298.87,3579.31 3304.87,3585.31 3315.22,3585.31 3321.22,3579.31 4026.55,3579.31 4061.05,3613.81 4825.05,3613.81 J5.16@5458.05,2980.81
  Bottom Layer (*.GBL) w5: v1(3058.05,3583.81) 3061.05,3586.81 J2.46@3173.06,3586.81
NetJ2_47: J2.47 J5.13 U1.A47 | length 2664.1
  Top Layer (*.GTL) w5: v1(3310.05,3572.81) 3310.05,3566.81 3310.29,3567.06 U1.A47@3408.2,3567.06 4428.8,3567.06 5115.05,2880.81 5152.44,2880.81 5189.47,2843.78 5473.38,2843.78 5510.41,2880.81 J5.13@5558.05,2880.81
  Bottom Layer (*.GBL) w5: v1(3310.05,3572.81) 3310.05,3566.81 3310.35,3567.11 J2.47@3399.04,3567.11
NetJ2_49: J2.49 J5.11 U1.A49 | length 2701.9
  Top Layer (*.GTL) w5: v1(3309.15,3547.27) 3309.15,3542.71 3310.05,3541.81 3315.61,3547.37 U1.A49@3408.2,3547.37 4348.49,3547.37 5115.05,2780.81 5142.44,2780.81 5179.94,2743.31 5472.91,2743.31 5510.41,2780.81 J5.11@5558.05,2780.81
  Bottom Layer (*.GBL) w5: v1(3309.15,3547.27) 3309.15,3542.71 3310.05,3541.81 3315.65,3547.41 J2.49@3399.04,3547.41
NetJ2_50: J2.50 J5.12 R9.1 U1.A50 | length 3234.8
  Top Layer (*.GTL) w5: v1(3058.05,3543.81) 3129.49,3543.81 3133.05,3547.37 U1.A50@3164.9,3547.37 ; R9.1@5208.05,2775.81 J5.12@5453.05,2775.81
  Mid-Layer 1 (*.G1) w5: v1(3058.05,3543.81) 3290.37,3543.81 3299.41,3534.77 3314.33,3534.77 3320.87,3541.31 3330.37,3541.31 3342.37,3529.31 4008.55,3529.31 4061.05,3581.81 4657.05,3581.81 J5.12@5458.05,2780.81
  Bottom Layer (*.GBL) w5: v1(3058.05,3543.81) 3061.65,3547.41 J2.50@3173.06,3547.41
NetJ2_51: J2.51 J5.9 U1.A51 | length 2743.9
  Top Layer (*.GTL) w5: v1(3310.05,3507.81) 3310.05,3515.49 3322.24,3527.69 U1.A51@3408.2,3527.69 4268.17,3527.69 5115.05,2680.81 5152.44,2680.81 5189.47,2643.78 5473.38,2643.78 5510.41,2680.81 J5.9@5558.05,2680.81
  Bottom Layer (*.GBL) w5: v1(3310.05,3507.81) 3310.05,3515.49 3322.27,3527.71 J2.51@3399.04,3527.71
NetJ2_53: J2.53 J5.7 U1.A53 | length 2724.9
  Top Layer (*.GTL) w5: v1(3326.05,3513.81) 3331.86,3508 U1.A53@3408.2,3508 4187.86,3508 5115.05,2580.81 5142.44,2580.81 5179.94,2543.31 5472.91,2543.31 5510.41,2580.81 J5.7@5558.05,2580.81
  Bottom Layer (*.GBL) w5: v1(3326.05,3513.81) 3331.84,3508.01 J2.53@3399.04,3508.01
NetJ2_54: J2.54 J5.8 R10.1 U1.A54 | length 3307.7
  Top Layer (*.GTL) w5: v1(3058.05,3503.81) 3062.24,3508 U1.A54@3164.9,3508 ; R10.1@5208.05,2575.81 J5.8@5453.05,2575.81
  Mid-Layer 1 (*.G1) w5: v1(3058.05,3503.81) 3060.55,3501.31 3239.66,3501.31 3251.66,3513.31 3274.44,3513.31 3280.44,3507.31 3292.87,3507.31 3304.87,3495.31 3315.37,3495.31 3321.37,3501.31 4012.55,3501.31 4061.05,3549.81 4489.05,3549.81 J5.8@5458.05,2580.81
  Bottom Layer (*.GBL) w5: v1(3058.05,3503.81) 3062.25,3508.01 J2.54@3173.06,3508.01
NetJ2_55: J2.55 J5.5 U1.A55 | length 2753
  Top Layer (*.GTL) w5: v1(3326.05,3488.32) U1.A55@3408.2,3488.32 4107.54,3488.32 5115.05,2480.81 5152.44,2480.81 5189.47,2443.78 5473.38,2443.78 5510.41,2480.81 J5.5@5558.05,2480.81
  Bottom Layer (*.GBL) w5: v1(3326.05,3488.32) J2.55@3399.04,3488.31
NetJ2_57: J2.57 J5.3 U1.A57 | length 2836.5
  Top Layer (*.GTL) w5: v1@3302.7,3476.31 3318.37,3476.31 3326.05,3468.63 U1.A57@3408.2,3468.63 4027.23,3468.63 5115.05,2380.81 5142.44,2380.81 5179.94,2343.31 5472.91,2343.31 5510.41,2380.81 J5.3@5558.05,2380.81
  Bottom Layer (*.GBL) w5: v1(3304.05,3471.81) 3395.84,3471.81 J2.57@3399.04,3468.61
NetJ2_58: J2.58 J5.4 R11.1 U1.A58 | length 3367.9
  Top Layer (*.GTL) w5: v1(3058.05,3463.81) 3062.87,3468.63 U1.A58@3164.9,3468.63 ; R11.1@5208.05,2375.81 J5.4@5453.05,2375.81
  Mid-Layer 1 (*.G1) w5: v1(3058.05,3463.81) 3062.55,3459.31 3309.22,3459.31 3313.72,3463.81 4007.05,3463.81 4061.05,3517.81 4321.05,3517.81 J5.4@5458.05,2380.81
  Bottom Layer (*.GBL) w5: v1(3058.05,3463.81) 3062.85,3468.61 J2.58@3173.06,3468.61
NetJ2_59: J2.59 J5.1 U1.A59 | length 2819.5
  Top Layer (*.GTL) w5: v1(3326.05,3448.94) U1.A59@3408.2,3448.94 3417.34,3439.81 3956.05,3439.81 5115.05,2280.81 5152.44,2280.81 5189.47,2243.78 5473.38,2243.78 5510.41,2280.81 J5.1@5558.05,2280.81
  Bottom Layer (*.GBL) w5: v1(3326.05,3448.94) J2.59@3399.04,3448.91
NetJ2_61: J2.61 J6.2 U1.A61 | length 3734.9
  Top Layer (*.GTL) w5: v1(3331.05,3232.41) U1.A61@3408.2,3232.41 3466.05,3232.41 3763.05,2935.41 3763.05,1983.81 3995.05,1751.81 ; 3992.05,1751.81 3995.05,1751.81 ; J6.2@5328.05,1186.81 5328.05,1217.15 5365.07,1254.18 5365.07,1530.39 5328.05,1567.42 5328.05,1581.81 5158.05,1751.81 3995.05,1751.81
  Bottom Layer (*.GBL) w5: v1(3331.05,3232.41) 3350.74,3232.41 3351.05,3232.71 J2.61@3399.04,3232.71
NetJ2_62: J2.62 J6.1 R12.1 U1.A62 | length 6002.5
  Top Layer (*.GTL) w5: v1(2055.05,2228.35) 2057.72,2228.35 2128.26,2157.81 2434.05,2157.81 2754.05,2477.81 2754.05,2872.41 3114.05,3232.41 U1.A62@3164.9,3232.41 3252.74,3232.41 v1(3253.05,3232.71) ; R12.1@5323.05,1511.81 5323.05,1291.81 J6.1@5328.05,1286.81
  Bottom Layer (*.GBL) w5: v1(2055.05,2228.35) 4606.51,2228.35 5328.05,1506.81 J6.1@5328.05,1286.81 ; J2.62@3173.06,3232.71 v1(3253.05,3232.71)
NetJ2_63: J2.63 J6.4 U1.A63 | length 3622.3
  Top Layer (*.GTL) w5: v1(3331.05,3212.72) U1.A63@3408.2,3212.72 3466.05,3212.72 3753.05,2925.72 3753.05,1976.67 3987.91,1741.81 5068.05,1741.81 5228.05,1581.81 5228.05,1567.42 5191.02,1530.39 5191.02,1271.47 5228.05,1234.45 J6.4@5228.05,1186.81
  Bottom Layer (*.GBL) w5: v1(3331.05,3212.72) 3350.76,3212.72 3351.05,3213.01 J2.63@3399.04,3213.01
NetJ2_65: J2.65 J6.6 U1.A65 | length 3510.9
  Top Layer (*.GTL) w5: v1(3331.05,3193.04) U1.A65@3408.2,3193.04 3466.05,3193.04 3743.05,2916.04 3743.05,1972.53 3983.76,1731.81 4978.05,1731.81 5128.05,1581.81 5128.05,1339.18 5091.02,1302.15 5091.02,1271.47 5128.05,1234.45 J6.6@5128.05,1186.81
  Bottom Layer (*.GBL) w5: v1(3331.05,3193.04) 3350.77,3193.04 3351.05,3193.31 J2.65@3399.04,3193.31
NetJ2_66: J2.66 J6.5 U1.A66 | length 5543.2
  Top Layer (*.GTL) w5: v1(2055.05,2198.35) 2057.72,2198.35 2118.26,2137.81 2442.33,2137.81 2774.05,2469.53 2774.05,2853.04 3114.05,3193.04 U1.A66@3164.9,3193.04 3252.77,3193.04 v1(3253.05,3193.31)
  Bottom Layer (*.GBL) w5: v1(2055.05,2198.35) 4434.51,2198.35 5128.05,1504.81 J6.5@5128.05,1286.81 ; J2.66@3173.06,3193.31 v1(3253.05,3193.31)
NetJ2_67: J2.67 J6.8 U1.A67 | length 3399.5
  Top Layer (*.GTL) w5: v1(3331.05,3173.35) U1.A67@3408.2,3173.35 3466.05,3173.35 3733.05,2906.35 3733.05,1968.38 3979.62,1721.81 4888.05,1721.81 5028.05,1581.81 5028.05,1339.18 4991.02,1302.15 4991.02,1271.47 5028.05,1234.45 J6.8@5028.05,1186.81
  Bottom Layer (*.GBL) w5: v1(3331.05,3173.35) 3350.79,3173.35 3351.05,3173.61 J2.67@3399.04,3173.61
NetJ2_68: J2.68 J6.7 U1.A68 | length 5427.6
  Top Layer (*.GTL) w5: v1(2055.05,2183.35) 2057.72,2183.35 2113.26,2127.81 2446.47,2127.81 2784.05,2465.38 2784.05,2843.35 3114.05,3173.35 U1.A68@3164.9,3173.35 3252.79,3173.35 v1(3253.05,3173.61)
  Bottom Layer (*.GBL) w5: v1(2055.05,2183.35) 4349.51,2183.35 5028.05,1504.81 J6.7@5028.05,1286.81 ; J2.68@3173.06,3173.61 v1(3253.05,3173.61)
NetJ2_69: J2.69 J6.10 U1.A69 | length 3288.1
  Top Layer (*.GTL) w5: v1(3331.05,3153.67) U1.A69@3408.2,3153.67 3466.05,3153.67 3723.05,2896.67 3723.05,1964.24 3975.48,1711.81 4798.05,1711.81 4928.05,1581.81 4928.05,1339.18 4891.02,1302.15 4891.02,1271.47 4928.05,1234.45 J6.10@4928.05,1186.81
  Bottom Layer (*.GBL) w5: v1(3331.05,3153.67) 3350.8,3153.67 3351.05,3153.91 J2.69@3399.04,3153.91
NetJ2_70: J2.70 J6.9 U1.A70 | length 5312.1
  Top Layer (*.GTL) w5: v1(2055.05,2168.35) 2057.72,2168.35 2108.26,2117.81 2450.62,2117.81 2794.05,2461.24 2794.05,2833.67 3114.05,3153.67 U1.A70@3164.9,3153.67 3252.8,3153.67 v1(3253.05,3153.91)
  Bottom Layer (*.GBL) w5: v1(2055.05,2168.35) 4264.51,2168.35 4928.05,1504.81 J6.9@4928.05,1286.81 ; J2.70@3173.06,3153.91 v1(3253.05,3153.91)
NetJ2_71: J2.71 J6.12 R13.1 U1.A71 | length 3281.6
  Top Layer (*.GTL) w5: v1(3331.05,3133.98) U1.A71@3408.2,3133.98 3466.05,3133.98 3713.05,2886.98 3713.05,1960.1 3971.34,1701.81 4708.05,1701.81 4828.05,1581.81 4828.05,1339.18 4791.02,1302.15 4791.02,1271.47 4828.05,1234.45 J6.12@4828.05,1186.81 R13.1@4828.05,1086.81 R13.1@4828.05,1081.81
  Bottom Layer (*.GBL) w5: v1(3331.05,3133.98) 3350.82,3133.98 3351.05,3134.21 J2.71@3399.04,3134.21
NetJ2_72: J2.72 J6.11 U1.A72 | length 5196.6
  Top Layer (*.GTL) w5: v1(2055.05,2153.35) 2057.72,2153.35 2103.26,2107.81 2454.76,2107.81 2804.05,2457.1 2804.05,2823.98 3114.05,3133.98 U1.A72@3164.9,3133.98 3252.82,3133.98 v1(3253.05,3134.21)
  Bottom Layer (*.GBL) w5: v1(2055.05,2153.35) 4179.51,2153.35 4828.05,1504.81 J6.11@4828.05,1286.81 ; J2.72@3173.06,3134.21 v1(3253.05,3134.21)
NetJ2_73: J2.73 J6.14 R14.1 U1.A73 | length 3170.2
  Top Layer (*.GTL) w5: v1(3331.05,3114.3) U1.A73@3408.2,3114.3 3466.05,3114.3 3703.05,2877.3 3703.05,1955.96 3967.19,1691.81 4618.05,1691.81 4728.05,1581.81 4728.05,1339.18 4691.02,1302.15 4691.02,1271.47 4728.05,1234.45 J6.14@4728.05,1186.81 R14.1@4728.05,1081.81
  Bottom Layer (*.GBL) w5: v1(3331.05,3114.3) 3350.83,3114.3 3351.05,3114.51 J2.73@3399.04,3114.51
NetJ2_74: J2.74 J6.13 U1.A74 | length 5081
  Top Layer (*.GTL) w5: v1(2055.05,2138.35) 2057.72,2138.35 2098.26,2097.81 2458.9,2097.81 2814.05,2452.96 2814.05,2814.3 3114.05,3114.3 U1.A74@3164.9,3114.3 3252.83,3114.3 v1(3253.05,3114.51)
  Bottom Layer (*.GBL) w5: v1(2055.05,2138.35) 4094.51,2138.35 4728.05,1504.81 J6.13@4728.05,1286.81 ; J2.74@3173.06,3114.51 v1(3253.05,3114.51)
NetJ2_75: J2.75 J6.16 R15.1 U1.A75 | length 3058.8
  Top Layer (*.GTL) w5: v1(3331.05,3094.61) U1.A75@3408.2,3094.61 3466.05,3094.61 3693.05,2867.61 3693.05,1951.82 3963.05,1681.81 4528.05,1681.81 4628.05,1581.81 4628.05,1339.18 4591.02,1302.15 4591.02,1271.47 4628.05,1234.45 J6.16@4628.05,1186.81 R15.1@4628.05,1081.81
  Bottom Layer (*.GBL) w5: v1(3331.05,3094.61) 3350.85,3094.61 3351.05,3094.81 J2.75@3399.04,3094.81
NetJ2_76: J2.76 J6.15 U1.A76 | length 4965.5
  Top Layer (*.GTL) w5: v1(2055.05,2123.35) 2057.72,2123.35 2093.26,2087.81 2463.04,2087.81 2824.05,2448.82 2824.05,2804.61 3114.05,3094.61 U1.A76@3164.9,3094.61 3252.85,3094.61 v1(3253.05,3094.81)
  Bottom Layer (*.GBL) w5: v1(2055.05,2123.35) 4009.51,2123.35 4628.05,1504.81 J6.15@4628.05,1286.81 ; J2.76@3173.06,3094.81 v1(3253.05,3094.81)
NetJ2_77: J2.77 J6.18 R16.1 U1.A77 | length 2947.4
  Top Layer (*.GTL) w5: v1(3331.05,3074.93) U1.A77@3408.2,3074.93 3466.05,3074.93 3683.05,2857.93 3683.05,1947.67 3958.91,1671.81 4438.05,1671.81 4528.05,1581.81 4528.05,1339.18 4491.02,1302.15 4491.02,1271.47 4528.05,1234.45 J6.18@4528.05,1186.81 R16.1@4528.05,1081.81
  Bottom Layer (*.GBL) w5: v1(3331.05,3074.93) 3350.86,3074.93 3351.05,3075.11 J2.77@3399.04,3075.11
NetJ2_78: J2.78 J6.17 U1.A78 | length 4849.9
  Top Layer (*.GTL) w5: v1(2055.05,2108.35) 2057.72,2108.35 2088.26,2077.81 2467.18,2077.81 2834.05,2444.67 2834.05,2794.93 3114.05,3074.93 U1.A78@3164.9,3074.93 3252.86,3074.93 v1(3253.05,3075.11)
  Bottom Layer (*.GBL) w5: v1(2055.05,2108.35) 3924.51,2108.35 4528.05,1504.81 J6.17@4528.05,1286.81 ; J2.78@3173.06,3075.11 v1(3253.05,3075.11)
NetJ2_79: J2.79 J6.20 R17.1 U1.A79 | length 2836
  Top Layer (*.GTL) w5: v1(3331.05,3055.24) U1.A79@3408.2,3055.24 3466.05,3055.24 3673.05,2848.24 3673.05,1943.53 3954.77,1661.81 4348.05,1661.81 4428.05,1581.81 4428.05,1486.79 4391.02,1449.76 4391.02,1271.47 4428.05,1234.45 J6.20@4428.05,1186.81 R17.1@4428.05,1081.81
  Bottom Layer (*.GBL) w5: v1(3331.05,3055.24) 3350.88,3055.24 3351.05,3055.41 J2.79@3399.04,3055.41
NetJ2_81: J2.81 J6.22 R18.1 U1.A81 | length 2724.6
  Top Layer (*.GTL) w5: v1(3331.05,3035.56) U1.A81@3408.2,3035.56 3466.05,3035.56 3663.05,2838.56 3663.05,1939.39 3950.63,1651.81 4258.05,1651.81 4328.05,1581.81 4328.05,1339.18 4291.02,1302.15 4291.02,1271.47 4328.05,1234.45 J6.22@4328.05,1186.81 R18.1@4328.05,1081.81
  Bottom Layer (*.GBL) w5: v1(3331.05,3035.56) 3350.89,3035.56 3351.05,3035.71 J2.81@3399.04,3035.71
NetJ2_82: J2.82 J6.21 U1.A82 | length 4618.8
  Top Layer (*.GTL) w5: v1(2055.05,2078.35) 2057.72,2078.35 2078.26,2057.81 2475.47,2057.81 2854.05,2436.39 2854.05,2775.56 3114.05,3035.56 U1.A82@3164.9,3035.56 3252.89,3035.56 v1(3253.05,3035.71)
  Bottom Layer (*.GBL) w5: v1(2055.05,2078.35) 3754.51,2078.35 4328.05,1504.81 J6.21@4328.05,1286.81 ; J2.82@3173.06,3035.71 v1(3253.05,3035.71)
NetJ2_83: J2.83 J6.24 R19.1 U1.A83 | length 2613.2
  Top Layer (*.GTL) w5: v1(3331.05,3015.87) U1.A83@3408.2,3015.87 3466.05,3015.87 3653.05,2828.87 3653.05,1935.25 3946.48,1641.81 4168.05,1641.81 4228.05,1581.81 4228.05,1486.79 4191.02,1449.76 4191.02,1271.47 4228.05,1234.45 J6.24@4228.05,1186.81 R19.1@4228.05,1081.81
  Bottom Layer (*.GBL) w5: v1(3331.05,3015.87) 3350.91,3015.87 3351.05,3016.01 J2.83@3399.04,3016.01
NetJ2_85: J2.85 J6.26 R20.1 U1.A85 | length 2501.8
  Top Layer (*.GTL) w5: v1(3331.05,2996.19) U1.A85@3408.2,2996.19 3466.05,2996.19 3643.05,2819.19 3643.05,1931.11 3942.34,1631.81 4078.05,1631.81 4128.05,1581.81 4128.05,1339.18 4091.02,1302.15 4091.02,1271.47 4128.05,1234.45 J6.26@4128.05,1186.81 R20.1@4128.05,1081.81
  Bottom Layer (*.GBL) w5: v1(3331.05,2996.19) 3350.92,2996.19 3351.05,2996.31 J2.85@3399.04,2996.31
NetJ2_86: J2.86 J6.25 U1.A86 | length 4387.7
  Top Layer (*.GTL) w5: v1(2055.05,2048.35) 2057.72,2048.35 2068.26,2037.81 2483.75,2037.81 2874.05,2428.11 2874.05,2756.19 3114.05,2996.19 U1.A86@3164.9,2996.19 3252.92,2996.19 v1(3253.05,2996.31)
  Bottom Layer (*.GBL) w5: v1(2055.05,2048.35) 3584.51,2048.35 4128.05,1504.81 J6.25@4128.05,1286.81 ; J2.86@3173.06,2996.31 v1(3253.05,2996.31)
NetJ2_87: J2.87 J6.28 R21.1 U1.A87 | length 2403.3
  Top Layer (*.GTL) w5: v1(3331.05,2976.5) U1.A87@3408.2,2976.5 3466.05,2976.5 3633.05,2809.5 3633.05,1926.96 3938.2,1621.81 3994.05,1621.81 3995.05,1620.81 4011.05,1620.81 4028.05,1603.81 4028.05,1486.79 3991.02,1449.76 3991.02,1271.47 4028.05,1234.45 J6.28@4028.05,1186.81 R21.1@4028.05,1081.81
  Bottom Layer (*.GBL) w5: v1(3331.05,2976.5) 3350.94,2976.5 3351.05,2976.61 J2.87@3399.04,2976.61
NetJ2_89: J2.89 J6.30 R22.1 U1.A89 | length 2730.9
  Top Layer (*.GTL) w5: v1(3331.05,2956.82) U1.A89@3408.2,2956.82 3466.05,2956.82 3623.05,2799.82 3623.05,2385.68 3484.18,2246.81 3272.05,2246.81 3253.05,2227.81 3253.05,2189.81 3928.05,1514.81 3928.05,1339.18 3891.02,1302.15 3891.02,1271.47 3928.05,1234.45 J6.30@3928.05,1186.81 R22.1@3928.05,1081.81
  Bottom Layer (*.GBL) w5: v1(3331.05,2956.82) 3350.95,2956.82 3351.05,2956.91 J2.89@3399.04,2956.91
NetJ2_90: J2.90 J6.29 U1.A90 | length 4156.6
  Top Layer (*.GTL) w5: v1(2055.05,2018.35) 2055.58,2017.81 2492.04,2017.81 2894.05,2419.82 2894.05,2736.82 3114.05,2956.82 U1.A90@3164.9,2956.82 3196.05,2956.82 3196.14,2956.91 v1(3253.05,2956.91)
  Bottom Layer (*.GBL) w5: v1(2055.05,2018.35) 3414.51,2018.35 3928.05,1504.81 J6.29@3928.05,1286.81 ; J2.90@3173.06,2956.91 v1(3253.05,2956.91)